# Altium PCB PCB1.PcbDoc
Units mil, origin at the board's own origin, x right, y up, seen from the top; angles counter-clockwise.
Board outline 6000 x 4000 mil, 2 copper layers (Top Layer, Bottom Layer); 19 components, 43 nets, 264 pads, 48 vias.
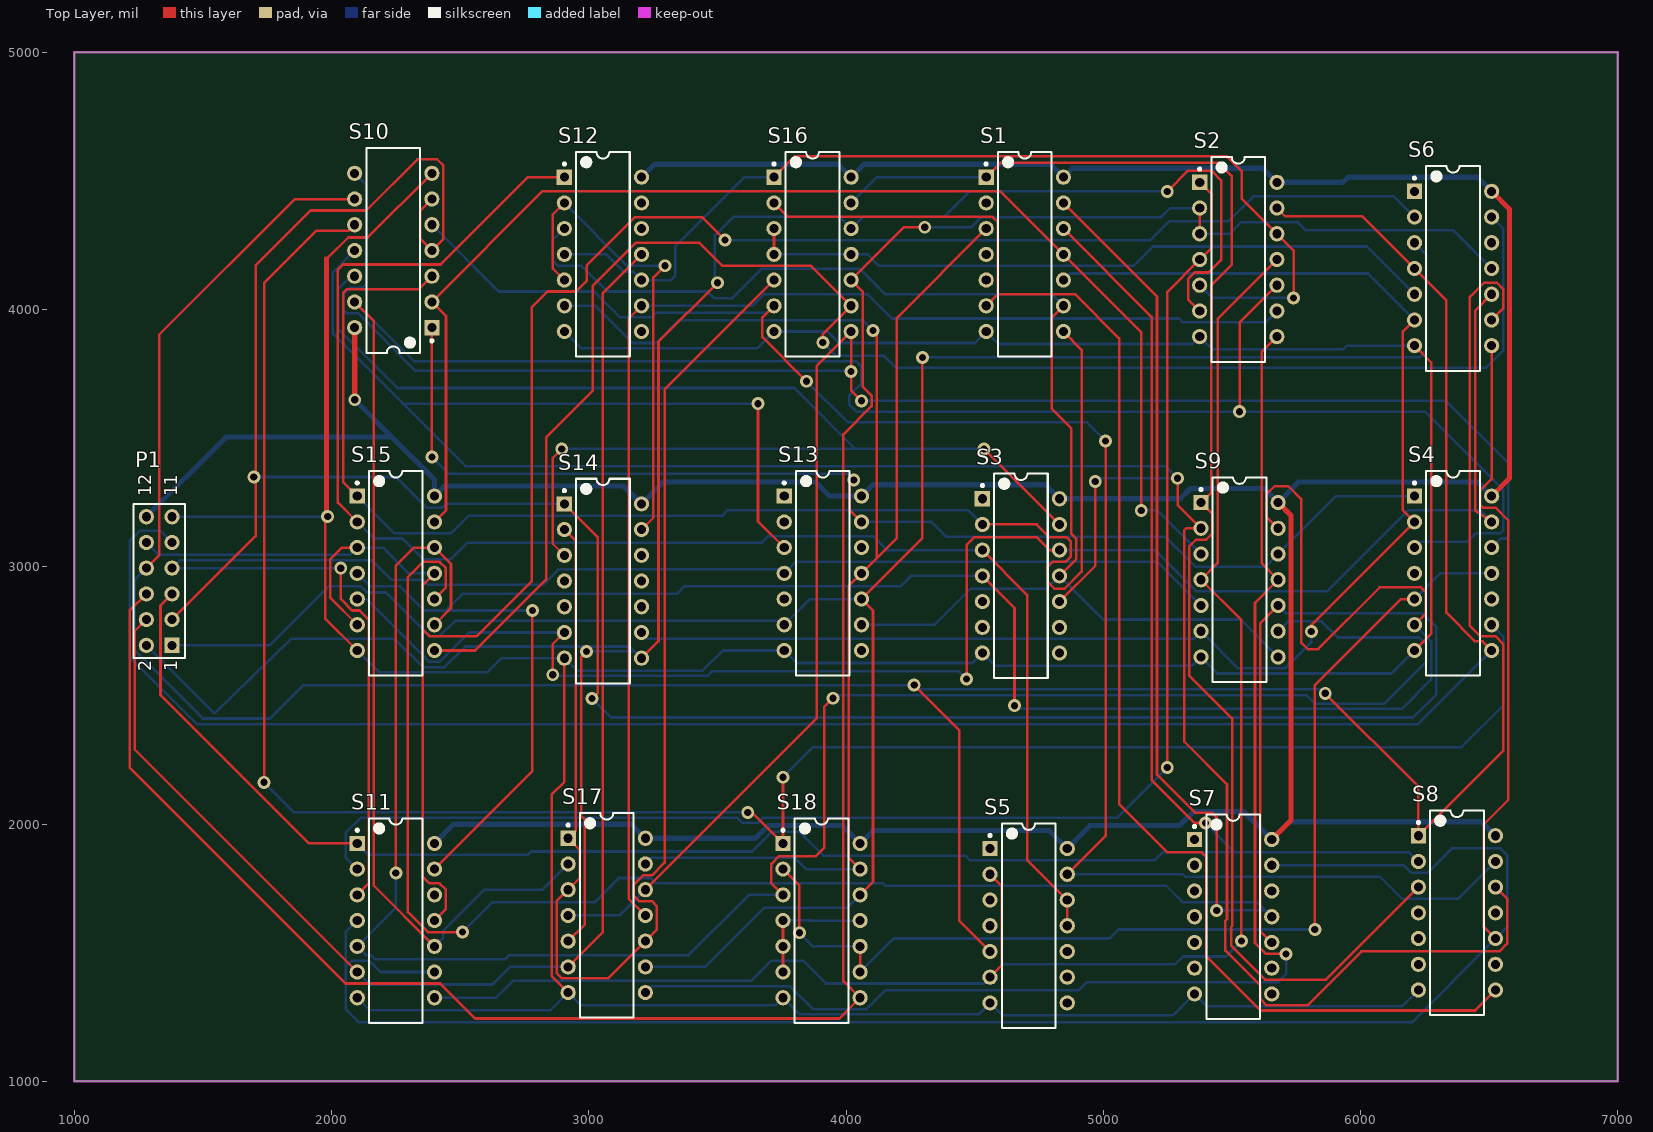
[diagram p0: Top Layer view]
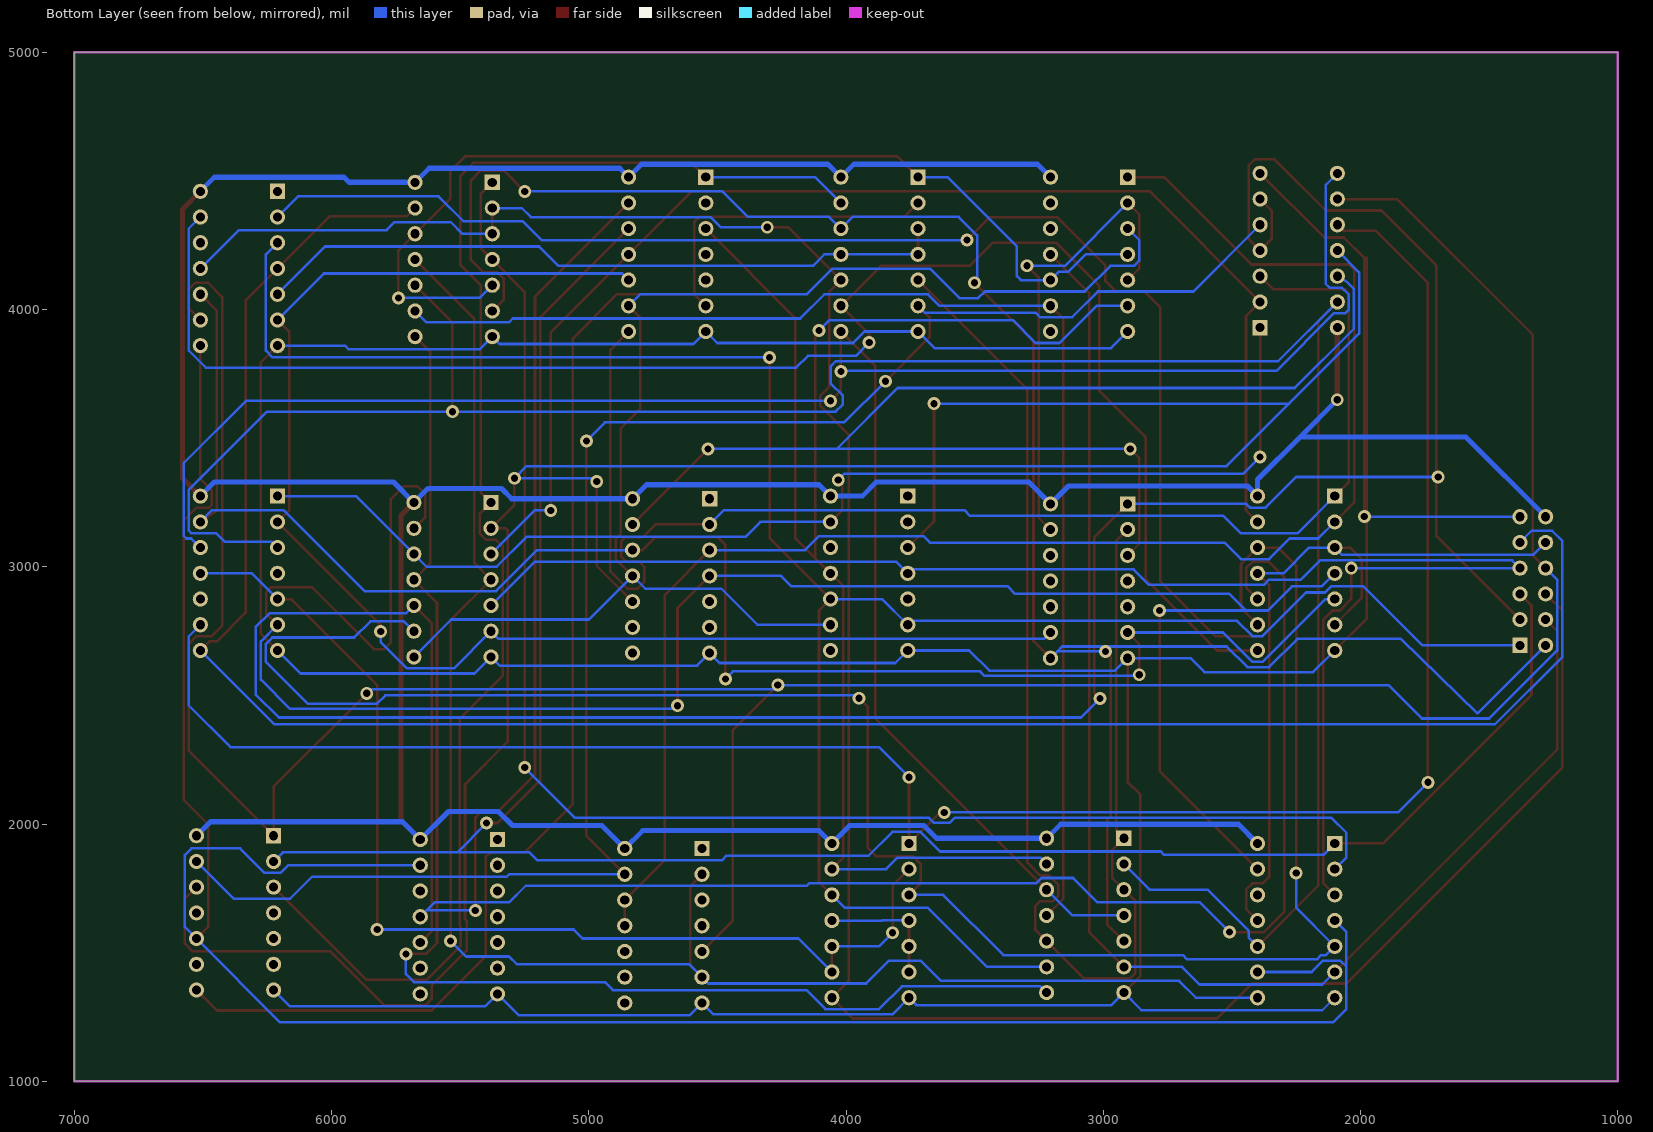
[diagram p1: Bottom Layer view, seen from below]

## Layer stack, top to bottom
Top Solder: solder mask 0.4, Solder Resist, Dk 3.5
Top Layer: signal copper 1.4
Dielectric 1: dielectric 12.6, FR-4, Dk 4.8
Bottom Layer: signal copper 1.4
Bottom Solder: solder mask 0.4, Solder Resist, Dk 3.5

## Board outline
1000,1000 7000,1000 7000,5000 1000,5000

## Design rules (kind name [scope] priority, off if disabled: settings)
Clearance [All] p1: gap=10 ignorepadtopadclearanceinfootprint=FALSE except(0: Arc-Hole Track-Hole SMDPad-Hole THPad-Hole Via-Hole Fill-Hole Poly-Hole Region-Hole Text-Hole)
PolygonConnect [All] p1: connectstyle=Relief reliefconductorwidth=10 reliefentries=4 polygonreliefangle="90 Angle" airgapwidth=10
RoomDefinition Sheet1 [InComponentClass('Sheet1')] p1: confinementstyle=ConfineIn formatcopy=TRUE lockcomponents=FALSE outline 1060,1080 6905,1080 6905,4860 1060,4860
RoutingVias [All] p1: holewidth=28 width=50 viastyle="Through Hole" minholewidth=28 minwidth=50 maxholewidth=28 maxwidth=50
SolderMaskExpansion [All] p1: expansion=4
Width WidthVCC [InNet('VCC')] p1: maxlimit=20 minlimit=20 preferedwidth=20 minimp=50.000000 maximp=50.000000 favimp=50.000000
Width Width_1 [All] p2: maxlimit=10 minlimit=10 preferedwidth=10
30 further rules are at their usual default settings.

## Components (designator, comment, footprint, x,y, rotation, side; value= is the part's Value field where it differs from the comment)
P1 "Header 6X2" HDR2X6 1380,2694.53 r90 top
S1 "SW DIP-7" DIP-14 4695,4214.53 r0 top
S2 "SW DIP-7" DIP-14 5525,4194.53 r0 top
S3 "SW DIP-7" DIP-14 4680,2964.53 r0 top
S4 "SW DIP-7" DIP-14 6360,2974.53 r0 top
S5 "SW DIP-7" DIP-14 4710,1604.53 r0 top
S6 "SW DIP-7" DIP-14 6360,4159.53 r0 top
S7 "SW DIP-7" DIP-14 5505,1639.53 r0 top
S8 "SW DIP-7" DIP-14 6375,1654.53 r0 top
S9 "SW DIP-7" DIP-14 5530,2949.53 r0 top
S10 "SW DIP-7" DIP-14 2240,4229.53 r180 top
S11 "SW DIP-7" DIP-14 2250,1624.53 r0 top
S12 "SW DIP-7" DIP-14 3055,4214.53 r0 top
S13 "SW DIP-7" DIP-14 3910,2974.53 r0 top
S14 "SW DIP-7" DIP-14 3055,2944.53 r0 top
S15 "SW DIP-7" DIP-14 2250,2974.53 r0 top
S16 "SW DIP-7" DIP-14 3870,4214.53 r0 top
S17 "SW DIP-7" DIP-14 3070,1644.53 r0 top
S18 "SW DIP-7" DIP-14 3905,1624.53 r0 top

## Footprints (in the part's own frame and the unit in brackets; to place one, negate y for a bottom-side part, rotate by r counter-clockwise, add the part's x,y. Pads: shape width x height; smd on the part's side, far side on the other; paste and mask are expansions set on the pad)
DIP-14 [mm] "DIP; 14 Leads; Row Spacing 7.62 mm; Pitch 2.54 mm"
  rect 1.5x1.5 hole 0.9: 1(-3.81,7.62)
  round 1.5 hole 0.9: 2(-3.81,5.08) 3(-3.81,2.54) 4(-3.81,0) 5(-3.81,-2.54) 6(-3.81,-5.08) 7(-3.81,-7.62) 8(3.81,-7.62) 9(3.81,-5.08) 10(3.81,-2.54) 11(3.81,0) 12(3.81,2.54) 13(3.81,5.08) 14(3.81,7.62)
  silkscreen extent -3.93,-10.1 2.65,10.1, body extent -3.6,-10.1 3.6,10.1, height 5.08
HDR2X6 [mm] "Connector; Header; 6x2 Position"
  rect 1.5x1.5 hole 0.9: 1(0,0)
  round 1.5 hole 0.9: 2(0,2.54) 3(2.54,0) 4(2.54,2.54) 5(5.08,0) 6(5.08,2.54) 7(7.62,0) 8(7.62,2.54) 9(10.16,0) 10(10.16,2.54) 11(12.7,0) 12(12.7,2.54)
  silkscreen extent -1.27,-1.27 13.97,3.81

## Part data
P1: "Header, 6-Pin, Dual row", LatestRevisionDate=17-Jul-2002, LatestRevisionNote="Re-released for DXP Platform.", Publisher="Altium Limited"
S1 S2 S3 S4 S5 S6 S7 S8 S9 S10 S11 S12 S13 S14 S15 S16 S17 S18: "DIP Switch, 7 Position, SPST", Code_JEDEC=MO-001-AF, LatestRevisionDate=17-Jul-2002, LatestRevisionNote="Re-released for DXP Platform.", PackageReference=DIP-14, Published=24-Mar-1999, Publisher="Altium Limited"

## Via types
v1: diameter 50, hole 28, Top Layer to Bottom Layer, 48 vias

## Nets (pads, with @x,y where several pads share a name; then routed paths per layer and width w, separated by ;. In a path a pad name is that pad's centre, name@x,y a point inside that pad or via, vN(x,y) a via of type N, cw(c..) or ccw(c..) an arc to the next point about the centre after c; other vN are vias at no path point)
GND: P1.11 S1.7 S2.7 S3.7 S4.7 S5.7 S6.7 S7.7 S8.7 S9.7 S10.7 S11.7 S12.7 S13.7 S14.7 S15.7 S16.7 S17.7 S18.7 | length 18483.4
  Top Layer w10: v1(1985,3195) 1985,4200 ; S15.7 1975.47,2799.06 1975.47,4200.47 1984.53,4200.47 1985,4200 ; S10.7 2140.47,4280 2065,4280 1985,4200 ; S14.7 2905,2164 2855.47,2114.47 2855.47,1409.06 S17.7 ; S4.7 6274.53,2739.06 6274.53,3795 S6.7
  Bottom Layer w10: P1.11 1984.53,3194.53 v1(1985,3195) ; S11.7 2148.53,1276 2851.47,1276 S17.7 2968.53,1296 3726.47,1296 S18.7 3819.53,1260 4515.47,1260 S5.7 4608.53,1256 5271.47,1256 S7.7 5403.53,1291 6161.47,1291 S8.7 ; S15.7 2184.53,2590 2606.47,2590 2661,2644.53 S14.7 2953.53,2596 3442.47,2596 3521,2674.53 S13.7 3808.53,2626 4491.47,2626 S3.7 4578.53,2616 5346.47,2616 S9.7 5444.53,2585 6120.47,2585 S4.7 ; S12.7 2969.53,3850 3655.47,3850 S16.7 3927.55,3914.53 3972.07,3870 4500.47,3870 S1.7 4593.53,3866 5346.47,3866 S2.7 5423.53,3846 5935,3846 5948.53,3859.53 S6.7
NetLabel1: P1.6 S2.2 S2.3 S6.11 S16.10 S18.8 | length 9674.3
  Top Layer w10: P1.6 1215,2829.53 1215,2220 2055,1380 2422,1380 2558,1244 3974.47,1244 S18.8 3990,1389.53 3990,3515 4100,3625 4100,3665 4065,3700 4065,4069.53 S16.10 4225.47,4320 v1(4306,4320) ; S2.3 S2.2
  Bottom Layer w10: v1(4306,4320) 4487,4320 4526.06,4359.06 5225.06,4359.06 5260.53,4394.53 S2.2 ; S2.3 5491,4294.53 5536.47,4340 5755,4340 5786,4309 6360.53,4309 S6.11
NetLabel2: S2.10 S4.3 S10.13 S11.10 S17.2 | length 9305.1
  Top Layer w10: S10.13 2164.53,3955 2164.53,1760 S11.10 ; v1(5530,3603) 5530,3949.53 S2.10
  Bottom Layer w10: S10.13 2320.53,3799 4040,3799 4060,3779 4060,3713 4012,3665 4012,3631 4040,3603 v1(5530,3603) 6251,3603 6554.53,3299.47 6554.53,3140 6544.53,3130 6448,3130 6415,3097 6232.47,3097 S4.3 ; S11.10 2435,1559.53 2435,1585.09 2594.91,1745 2820.47,1745 S17.2
NetLabel3: S3.13 S10.12 S14.3 | length 4943.9
  Top Layer w10: v1(2895,3458) 2860,3423 2860,3089.53 S14.3 ; v1(4536.53,3458) S3.13
  Bottom Layer w10: S10.12 2052.08,4106.6 2025.47,4080 2025.47,3925.23 2255.7,3695 3799,3695 4036,3458 ; v1(2895,3458) 4036,3458 ; v1(4536.53,3458) 4036,3458
NetLabel4: S4.9 S10.10 S18.1 | length 8008
  Top Layer w10: v1(1738,2162) 1738,4104 1940,4306 2066.47,4306 S10.10 ; v1(3618,2045) 3634.53,2045 S18.1 v1(3755,2182)
  Bottom Layer w10: v1(1738,2162) 1855,2045 v1(3618,2045) ; v1(3755,2182) 3872,2299 6393,2299 6555,2461 6555,2729.53 S4.9
NetLabel5: S1.3 S12.6 S13.11 S17.13 S18.13 | length 5797.3
  Top Layer w10: S18.13 4010,1869.53 4010,2924.53 S13.11 4120,3034.53 ; v1(4105,3918) 4120,3903 4120,3034.53 ; S1.3 4198,3967.53 4198,3112.53 4120,3034.53
  Bottom Layer w10: S12.6 3025.94,4014.53 3170.47,3870 3262.5,3870 3351.56,3959.06 4063.94,3959.06 v1(4105,3918) ; S17.13 3244.53,1869.06 3799.53,1869.06 3844.06,1824.53 S18.13
NetLabel6: S5.13 S8.13 S10.5 S16.6 | length 6649.1
  Top Layer w10: S16.6 3675,3969.53 3675,3893 v1(3847,3721) ; S5.13 5009,1953.53 v1(5009,3489)
  Bottom Layer w10: S10.5 2649.53,4070 3020.8,4070 3120.8,3970 3245,3970 3262,3987 3692.47,3987 S16.6 ; v1(3847,3721) 4007,3561 4937,3561 v1(5009,3489) ; S5.13 5309.47,1804.53 5319,1795 6075.47,1795 6160.47,1710 6380.47,1710 S8.13
NetLabel7: S18.4 S18.5 S18.6 S18.11 | length 500.6
  Top Layer w10: S18.6 S18.5 S18.4
  Bottom Layer w10: S18.4 3755.74,1625.26 3859,1625.26 3859.74,1624.53 S18.11
NetLabel8: S2.9 S12.9 S17.11 | length 4969.3
  Top Layer w10: S12.9 3155.47,3965 3155.47,1709.06 S17.11
  Bottom Layer w10: S12.9 3636.53,4014.53 3681.06,4059.06 4084.53,4059.06 4178.58,3965 5295.47,3965 5310.47,3950 5630.47,3950 S2.9
NetLabel9: S4.5 S4.11 S18.2 S18.9 S18.10 | length 4285.3
  Top Layer w10: S18.2 3819,1760.53 v1(3819,1577) ; S18.9 S18.10 ; v1(5822.57,1590) 5822.57,2540 6157.09,2874.53 S4.5
  Bottom Layer w10: v1(3819,1577) 3871.47,1524.53 S18.10 ; S18.9 4185.47,1555 5024,1555 5059,1590 v1(5822.57,1590) ; S4.5 6310,2974.53 S4.11
NetLabel10: S9.9 S11.5 S15.9 S15.12 S18.3 | length 7908.8
  Top Layer w10: v1(2250,1810) 2250,3004.53 2320,3074.53 S15.12 2464.53,3010 2464.53,2839.06 S15.9 ; S18.3 3710,1769.53 3710,1845 3740,1875 3883,1875 3916,1908 3916,2456 v1(3949,2489)
  Bottom Layer w10: v1(2250,1810) 2250,1674.53 S11.5 2135.47,1489.06 2154.51,1489.06 2169.57,1474 2674,1474 2690,1490 3388.47,1490 3623,1724.53 S18.3 ; v1(3949,2489) 3960,2500 5790.13,2500 5822.57,2467.56 6092.56,2467.56 6255,2630 6255,2700 6230,2725 5912,2725 5849,2788 5718.47,2788 S9.9
NetLabel11: P1.1 S6.3 S13.6 S13.10 S17.9 S18.12 | length 8513.8
  Top Layer w10: S18.12 4105,1774.53 4105,2829.53 S13.10 4297,3111.53 v1(4297,3814)
  Bottom Layer w10: P1.1 1759.53,2694.53 1990,2925 2113,2925 2138,2900 2211.56,2900 2381.56,2730 2420,2730 2480,2790 3744.53,2790 S13.6 3860,2874.53 S13.10 ; S17.9 3452.53,1444.53 3682,1674 4004.47,1674 S18.12 ; v1(4297,3814) 6229,3814 6255,3840 6255,4214.53 S6.3
NetLabel12: S4.12 S10.8 S16.8 S17.4 S17.12 | length 8797.7
  Top Layer w10: S17.12 3887,2411.53 3887,3781.53 S16.8 v1(4020,3759) 4020,3685 v1(4060,3645)
  Bottom Layer w10: S10.8 2135,4484.53 2135,4100 2120,4085 2073,4085 2045.47,4057.47 2045.47,3999.53 2060,3985 2104,3985 2327.33,3761.67 4017.33,3761.67 v1(4020,3759) ; S17.4 3120,1644.53 S17.12 ; v1(4060,3645) 6333,3645 6574.53,3403.47 6574.53,3120 6564.53,3110 6545.47,3110 S4.12
NetLabel13: S1.1 S8.3 S9.1 S16.13 | length 5687.4
  Top Layer w10: S1.1 4600.47,4570 5449,4570 5499,4520 5499,4174 5420,4095 5420,3289.53 S9.1 5424.53,3205 5424.53,3129.53 5400,3105 5360,3105 5335,3080 5335,2576 5501,2410 5501,1603.89 5497,1599.89 5497,1527 5629,1395 5865.47,1395 S8.3
  Bottom Layer w10: S16.13 4120,4514.53 S1.1
NetLabel14: S2.1 S2.4 S11.2 | length 5839.4
  Top Layer w10: v1(5249,2220) 5249,4068.53 S2.4 5420,4239.53 5420,4449.53 S2.1
  Bottom Layer w10: S11.2 2055,1869.53 2055,1966 2113,2024 3577.98,2024 3597.43,2004.55 3657.98,2004.55 3677.43,2024 5053,2024 v1(5249,2220)
NetLabel15: S6.13 S15.8 S16.9 | length 6379.8
  Top Layer w10: S15.8 2558.53,2674.53 2834,2950 2834,3503 3016,3685 3016,4093 3182.06,4259.06 3429.94,4259.06 3519,4170 3864.53,4170 S16.9 3910,3904.53 v1(3910,3872)
  Bottom Layer w10: v1(3910,3872) 3962,3820 4148,3820 4194,3774 6489,3774 6555,3840 6555,4314.53 S6.13
NetLabel16: P1.2 S2.6 S14.8 S16.12 S17.5 | length 8112.6
  Top Layer w10: S17.5 2985,1609.53 2985,2017 2970,2032 2970,2650 v1(2991,2671) ; S14.8 3271,2710.53 3271,3875 v1(3500,4104) ; v1(5249.06,4459.06) 5330,4540 5420,4540 5458,4502 5458,4192 5410,4144 5355,4144 5330,4119 5330,4039.53 S2.6
  Bottom Layer w10: P1.2 1544.53,2430 1843,2720 2245.47,2720 2355.47,2610 2440,2610 2520,2690 3159.53,2690 3178.53,2671 ; v1(2991,2671) 3178.53,2671 ; S14.8 3178.53,2671 ; v1(3500,4104) 3490,4114 3490,4288 3562,4360 3974.53,4360 S16.12 4065.47,4360 4381.42,4360 4480.47,4459.06 v1(5249.06,4459.06)
NetLabel17: S2.8 S9.11 S17.8 | length 5257.4
  Top Layer w10: S2.8 5615.47,3835 5615.47,3014.06 S9.11 5590,2859.53 5590,1538 5633,1495 v1(5711,1495)
  Bottom Layer w10: S17.8 3244.53,1369.06 3782.94,1369.06 3872,1280 4080,1280 4154,1354 4906,1354 4937,1385 5680,1385 5711,1416 v1(5711,1495)
NetLabel18: S1.10 S4.2 S6.6 S9.6 S14.9 | length 5634.1
  Top Layer w10: v1(5809,2748) 5809,2773.53 S4.2 6165,3219.53 6165,3914.53 S6.6
  Bottom Layer w10: S14.9 3229.53,2720 5350.47,2720 S9.6 5524.53,2605 5706,2605 5809,2708 v1(5809,2748) ; S1.10 4870.47,4140 6029.53,4140 S6.6
NetLabel19: P1.4 S11.6 S12.11 S17.6 | length 5503.5
  Top Layer w10: P1.4 1235,2749.53 1235,2289.53 S11.6 ; S17.6 3055,1579.53 3055,4064.53 S12.11
  Bottom Layer w10: S11.6 2148.53,1376 2625,1376 2693.53,1444.53 S17.6
NetLabel20: S14.2 S16.5 S17.1 S17.3 S17.10 | length 5124.2
  Top Layer w10: S14.2 2950,3099.53 2950,1974.53 S17.1 2965,1899.53 2965,1789.53 S17.3 2875.47,1700 2875.47,1420 2895.47,1400 3075.47,1400 S17.10 3265,1589.53 3265,1680 3245,1700 3195.47,1700 3175.47,1720 3175.47,1764.47 3211,1800 3245,1800 3295.2,1850.2 3295.2,3689.73 S16.5
NetLabel21: S3.4 S4.6 S9.13 S11.13 S15.4 | length 8138.3
  Top Layer w10: S11.13 2781,2205.53 v1(2781,2830) ; S3.4 4655,2839.53 v1(4655,2460) ; S9.13 5635.47,3194.06 5635.47,3282.47 5666,3313 5720,3313 5769,3264 5769,2706 5795,2680 5835,2680 6075,2920 6235,2920 6254.53,2900.47 6254.53,2819.06 S4.6
  Bottom Layer w10: S15.4 2150.8,2923.73 2266.27,2923.73 2360,2830 2444.53,2830 ; v1(2781,2830) 2444.53,2830 ; S3.4 4252.53,2964.53 4213,2925 3373,2925 3343,2895 2509.53,2895 2444.53,2830 ; v1(4655,2460) 4667.44,2447.56 6161.56,2447.56 6275,2561 6275,2709.53 S4.6
NetLabel22: S3.12 S4.13 S6.10 S14.6 S15.5 | length 6521.9
  Top Layer w10: v1(2860,2580) 2860,2699.53 S14.6 ; v1(4469,2564) 4469,3084 4500,3115 4740.51,3115 4790.98,3064.53 S3.12 ; S4.13 6445.47,3220 6445.47,3995 S6.10
  Bottom Layer w10: S15.5 2135.47,2874.53 2380,2630 2420,2630 2534.53,2744.53 S14.6 ; v1(2860,2580) 2864,2576 3462,2576 3479,2593 4440,2593 v1(4469,2564) ; S3.12 5200.47,3064.53 5360,2905 5871,2905 6186,3220 6464.53,3220 S4.13
NetLabel23: S3.3 S5.11 S5.12 S12.1 S15.2 | length 6186.5
  Top Layer w10: S15.2 2025,3249.53 2025,4155 2045,4175 2424,4175 2763.53,4514.53 S12.1 ; S3.3 4704,2890.53 4704,1860.53 S5.12 S5.11
  Bottom Layer w10: S15.2 2164.53,3110 2275.47,3110 2355.47,3030 2464.53,3030 2528.53,3094 3674,3094 3699.06,3119.06 4104.53,3119.06 4159.06,3064.53 S3.3
NetLabel24: S1.8 S3.2 S10.3 S15.1 | length 5463
  Top Layer w10: S15.1 2045,3329.53 2045,4064 2060,4079 2339.47,4079 S10.3 ; S3.2 4740.47,3164.53 4790,3115 4858,3115 4874.53,3098.47 4874.53,3040 4854.53,3020 4805,3020 4785,3000 4785,2940 4810.47,2914.53 4849.59,2914.53 4916,2980.93 4916,3843.53 S1.8
  Bottom Layer w10: S15.1 2244.53,3130 2464.53,3130 2533.53,3199 3519,3199 3540,3220 4474.53,3220 S3.2
NetLabel25: S1.13 S7.11 S15.10 | length 8387.8
  Top Layer w10: S15.10 2444.53,2919.06 2444.53,2994.53 2420,3019.06 2356.06,3019.06 2297,2960 2297,1658 2375,1580 v1(2509,1580) ; S1.13 5209,4050.53 5209,2192 5356.94,2044.06 5422.94,2044.06 5441,2026 v1(5441,1664)
  Bottom Layer w10: v1(2509,1580) 2624,1695 3022,1695 3117,1790 3240,1790 3260.94,1769.06 4142.94,1769.06 4152,1760 5245,1760 5310,1695 5599.53,1695 5630.53,1664 ; v1(5441,1664) 5630.53,1664 ; S7.11 5630.53,1664
NetLabel26: S1.6 S8.8 S16.2 | length 5652.9
  Top Layer w10: S16.2 3774.53,4360 4570,4360 4590,4340 4590,4059.53 ; S1.6 4590,4059.53 ; S8.8 6445.47,1275 5610.99,1275 5400.62,1485.36 5400.62,1871.38 5382,1890 5250,1890 5062,2078 5062,3888 4890,4060 4590,4059.53
NetLabel27: S1.9 S3.11 S9.8 S12.3 S13.9 | length 5259.6
  Top Layer w10: S3.11 4894.53,3029.06 4894.53,3109.53 4875,3129.06 4875,3539 4800,3614 4800,3969.53 S1.9
  Bottom Layer w10: S12.3 2860,4269.53 2860,4190 2880,4170 2972,4170 3072,4070 3460.43,4070 3486.11,4044.32 3559.32,4044.32 3674.06,4159.06 4051.94,4159.06 4151,4060 4799.53,4060 S1.9 ; S13.9 4344.53,2774.53 4485,2915 4780.47,2915 S3.11 4999.53,2795 5534.53,2795 S9.8
NetLabel28: S2.5 S2.12 S12.4 S12.10 S16.1 | length 3927.7
  Top Layer w10: S16.1 3801.47,4596 5480,4596 5538,4538 5538,4431.53 S2.12 5740,4229.53 v1(5740,4045)
  Bottom Layer w10: S12.4 3068.11,4214.53 3136.56,4146.08 3173.44,4146.08 S12.10 3320.53,4114.53 3336,4130 3336,4245.53 3605,4514.53 S16.1 ; S2.5 5424.53,4045 v1(5740,4045)
NetLabel29: S6.5 S16.3 S16.4 S16.11 | length 2716.3
  Top Layer w10: S16.4 S16.3
  Bottom Layer w10: S16.4 S16.11 4084.53,4214.53 4129.06,4170 5118,4170 5193,4245 6024.53,4245 S6.5
NetLabel30: P1.9 S2.13 S4.8 S6.4 | length 8431.7
  Top Layer w10: S2.13 5707.53,4362 6007.53,4362 S6.4 6334,4035.53 6334,2821.47 6445.47,2710 6474.53,2710 S4.8
  Bottom Layer w10: P1.9 1334.53,3140 1255,3140 1215.47,3100.47 1215.47,2649.53 1478,2387 6222.47,2387 S4.8
NetLabel31: P1.10 S6.2 S11.11 S15.3 S15.6 S15.11 | length 8402.8
  Top Layer w10: S15.6 1995.47,2879.06 1995.47,3030 2040,3074.53 S15.3 ; S11.11 2444.53,1669.06 2444.53,1744.53 2420,1769.06 2380,1769.06 2355,1794.06 2355,2755 ; S15.11 2355,2929.53 2355,2755 ; v1(3530,4270) 3440.94,4359.06 3179.53,4359.06 2991.58,4171.1 2991.58,4110.58 2951,4070 2840,4070 2779,4009 2779,2944 2565,2730 2380,2730 2355,2755
  Bottom Layer w10: P1.10 1328.53,3046 2071.47,3046 S15.3 2200,3074.53 2300,2974.53 S15.11 ; v1(3530,4270) 5183,4270 5257,4344 5488,4344 5584,4440 6129.53,4440 S6.2
NetLabel32: P1.7 S9.5 S11.3 S13.4 | length 6187.4
  Top Layer w10: v1(2036,2994.53) 2036,2874 2080,2830 2109.06,2830 2144.53,2794.53 2144.53,1769.06 S11.3
  Bottom Layer w10: v1(2036,2994.53) P1.7 1410.47,3025 2157,3025 2232,2950 2355,2950 2375,2930 2822,2930 2882,2990 3760,2990 S13.4 3804.53,3019.06 5210.47,3019.06 S9.5
NetLabel33: S1.11 S9.3 S10.2 S15.13 | length 5054.6
  Top Layer w10: S15.13 2445,3219.53 2445,3974.53 S10.2 2820.47,4460 4599.53,4460 S1.11 5148,3911.53 v1(5148,3219)
  Bottom Layer w10: v1(5148,3219) 5210.53,3219 S9.3
NetLabel34: S6.8 S7.13 S8.10 S11.4 S11.9 | length 9139
  Top Layer w10: S6.8 6510,3341 6465.47,3296.47 6465.47,3240 6475.47,3230 6525,3230 6574.53,3180.47 6574.53,2093.53 6480,1999 6480,1599.53 S8.10
  Bottom Layer w10: S11.4 2055,1579.53 2055,1445 ; S11.9 2189.53,1424.53 2145,1469.06 2079.06,1469.06 2055,1445 ; S7.13 6168.47,1839.53 6198,1810 6260,1810 6355,1905 6545,1905 6570,1880 6570,1599.53 S8.10 6199.47,1229 2106,1229 2055,1280 2055,1445
NetLabel35: S2.11 S5.2 S5.6 S9.4 S11.8 | length 6576.1
  Top Layer w10: S5.6 4605,1449.53 4605,1759.53 S5.2 ; v1(5537,1545) 5537,2792.53 S9.4 5444.53,3014.06 5444.53,3964.06 S2.11
  Bottom Layer w10: S11.8 2639.53,1324.53 2705,1390 3631.42,1390 3710.47,1469.06 3832.5,1469.06 3921.56,1380 4535.47,1380 S5.6 4610.47,1455 5280,1455 5310,1485 5477,1485 v1(5537,1545)
NetLabel36: S12.2 S12.5 S14.13 | length 1892.7
  Top Layer w10: S12.5 2860,4159.53 2860,4369.53 S12.2 ; S14.13 3251,3190.53 3251,4125 v1(3296,4170)
  Bottom Layer w10: S12.2 3149.53,4170 v1(3296,4170)
NetLabel37: S3.10 S8.12 S9.2 S10.11 S13.3 | length 10265.1
  Top Layer w10: v1(3658,3634) 3658,3176.53 S13.3 ; S3.10 4969,3003.53 v1(4969,3331) ; v1(5289,3344) 5289,3240.53 S9.2 5322.53,3149.53 5315,3142 5315,2320 5481,2154 5481,1630.38 5474.62,1624 5474.62,1508 5610.47,1372.15 5610.47,1320 5635.47,1295 5794,1295 6004,1505 6540,1505 6570,1535 6570,1709.53 S8.12
  Bottom Layer w10: S10.11 2005,4144.53 2005,3906 2277,3634 ; v1(3658,3634) 2277,3634 ; v1(4969,3331) 4982,3344 v1(5289,3344) 5242,3391 2520,3391 2277,3634
NetLabel38: S4.1 S9.12 S10.1 S13.13 | length 4703.1
  Top Layer w10: v1(2390,3427) S10.1 ; v1(4030,3337) 4015,3322 4015,3219.53 S13.13
  Bottom Layer w10: v1(2390,3427) 2455,3362 4005,3362 v1(4030,3337) ; S13.13 4332.47,3174.53 4391,3116 5242.21,3116 5358.21,3000 5630.47,3000 S9.12 5905,3274.53 S4.1
NetLabel39: P1.5 S1.12 S8.2 S11.1 | length 8393.8
  Top Layer w10: P1.5 1335,2849.53 1335,2502 1912.47,1924.53 S11.1 ; S1.12 5188,3971.53 5188,2171 5355,2004 v1(5397,2004)
  Bottom Layer w10: S11.1 2144.53,1880 2763,1880 2776,1893 3634.42,1893 3710.47,1969.06 3819.53,1969.06 3911.58,1877 4464,1877 4482,1859 5200,1859 5231,1890 5511,1890 ; v1(5397,2004) 5511,1890 ; S8.2 6189.53,1890 5511,1890
NetLabel40: P1.3 S7.10 S9.10 S10.4 S10.6 S14.1 | length 10715.9
  Top Layer w10: P1.3 1705,3119.53 v1@1705,3349 ; v1(1698,3349) v1@1705,3349 ; S10.6 2345,4384.53 2345,4274.53 S10.4 2435,4274.53 2435,4560 2411,4584 2334,4584 2135,4385 1919,4385 1705,4171 v1@1705,3349 ; S14.1 3035,3114.53 3035,2510 v1(3013,2488) ; S7.10 5610,1584.53 5610,2779.53 S9.10
  Bottom Layer w10: v1(1698,3349) 2250,3349 2369,3230 2430,3230 2444.53,3244.53 S14.1 ; v1(3013,2488) 3087,2414 6205,2414 6295,2504 6295,2765 6240,2820 5709.53,2820 S9.10
NetLabel41: P1.8 S5.5 S6.9 S8.1 S10.9 | length 11530.9
  Top Layer w10: P1.8 1330,3044.53 1330,3902 1857.53,4429.53 S10.9 ; v1(4265,2540) 4441,2364 4441,1623.53 S5.5 ; v1(5863,2508) 6225,2146 S8.1 6554.53,2284.06 6554.53,2700 6524.53,2730 6465.47,2730 6425,2770.47 6425,4049.06 6480,4104.06 6530.47,4104.06 6554.53,4080 6554.53,4004.06 S6.9
  Bottom Layer w10: P1.8 1235.47,2950 1235.47,2674.53 1500,2410 1761,2410 1891,2540 v1(4265,2540) 4281,2524 5847,2524 v1(5863,2508)
VCC: P1.12 S1.14 S2.14 S3.14 S4.14 S5.14 S6.14 S7.14 S8.14 S9.14 S10.14 S11.14 S12.14 S13.14 S14.14 S15.14 S16.14 S17.14 S18.14 | length 16708.4
  Top Layer w20: v1(2090,3649.27) S10.14 ; S7.14 5730,2014.53 5730,3199.53 S9.14 ; S4.14 6579.53,3344.06 6579.53,4390 S6.14
  Bottom Layer w20: P1.12 1590.47,3505 2234.27,3505 ; v1(2090,3649.27) 2234.27,3505 ; S11.14 2474.47,1999 3165.53,1999 S17.14 3647.96,1944.53 3697.48,1994.06 3985.47,1994.06 S18.14 4104.53,1974.06 4790.47,1974.06 S5.14 4949.47,1994 5296.6,1994 5351.6,2049 5545.53,2049 S7.14 5724.47,2009 6470.53,2009 S8.14 ; S12.14 3255.47,4565 3969.53,4565 S16.14 4070.47,4565 4794.53,4565 S1.14 4879.47,4549 5620.53,4549 S2.14 5932,4494.53 5951.47,4514 6455.53,4514 S6.14 ; S4.14 6455.53,3329 5759.47,3329 S9.14 5625.53,3304 5339.15,3304 5299.68,3264.53 S3.14 4775.53,3319 4104.47,3319 S13.14 3937,3274.53 3882.53,3329 3289.47,3329 S14.14 3135.47,3314.06 2439.53,3314.06 S15.14 2400,3339.27 2234.27,3505
pads on no net: S1.2 S1.4 S1.5 S3.1 S3.5 S3.6 S3.8 S3.9 S4.4 S4.10 S5.1 S5.3 S5.4 S5.8 S5.9 S5.10 S6.1 S6.12 S7.1 S7.2 S7.3 S7.4 S7.5 S7.6 S7.8 S7.9 S7.12 S8.4 S8.5 S8.6 S8.9 S8.11 S11.12 S12.8 S12.12 S12.13 S13.1 S13.2 S13.5 S13.8 S13.12 S14.4 S14.5 S14.10 S14.11 S14.12

## Keep-outs
Keep-Out Layer:
  the board outline again, w10

## Text inside footprints (layer, text, board x,y; h text height)
P1: Top Overlay "12" at 1300,3274.53 h50 r90; Top Overlay "1" at 1400,3314.53 h50 r90; Top Overlay "1" at 1400,3274.53 h50 r90; Top Overlay "1" at 1400,2594.53 h50 r90; Top Overlay "2" at 1300,2594.53 h50 r90